# EAGLE board Light switch schematic (EAGLE 9.1.3)
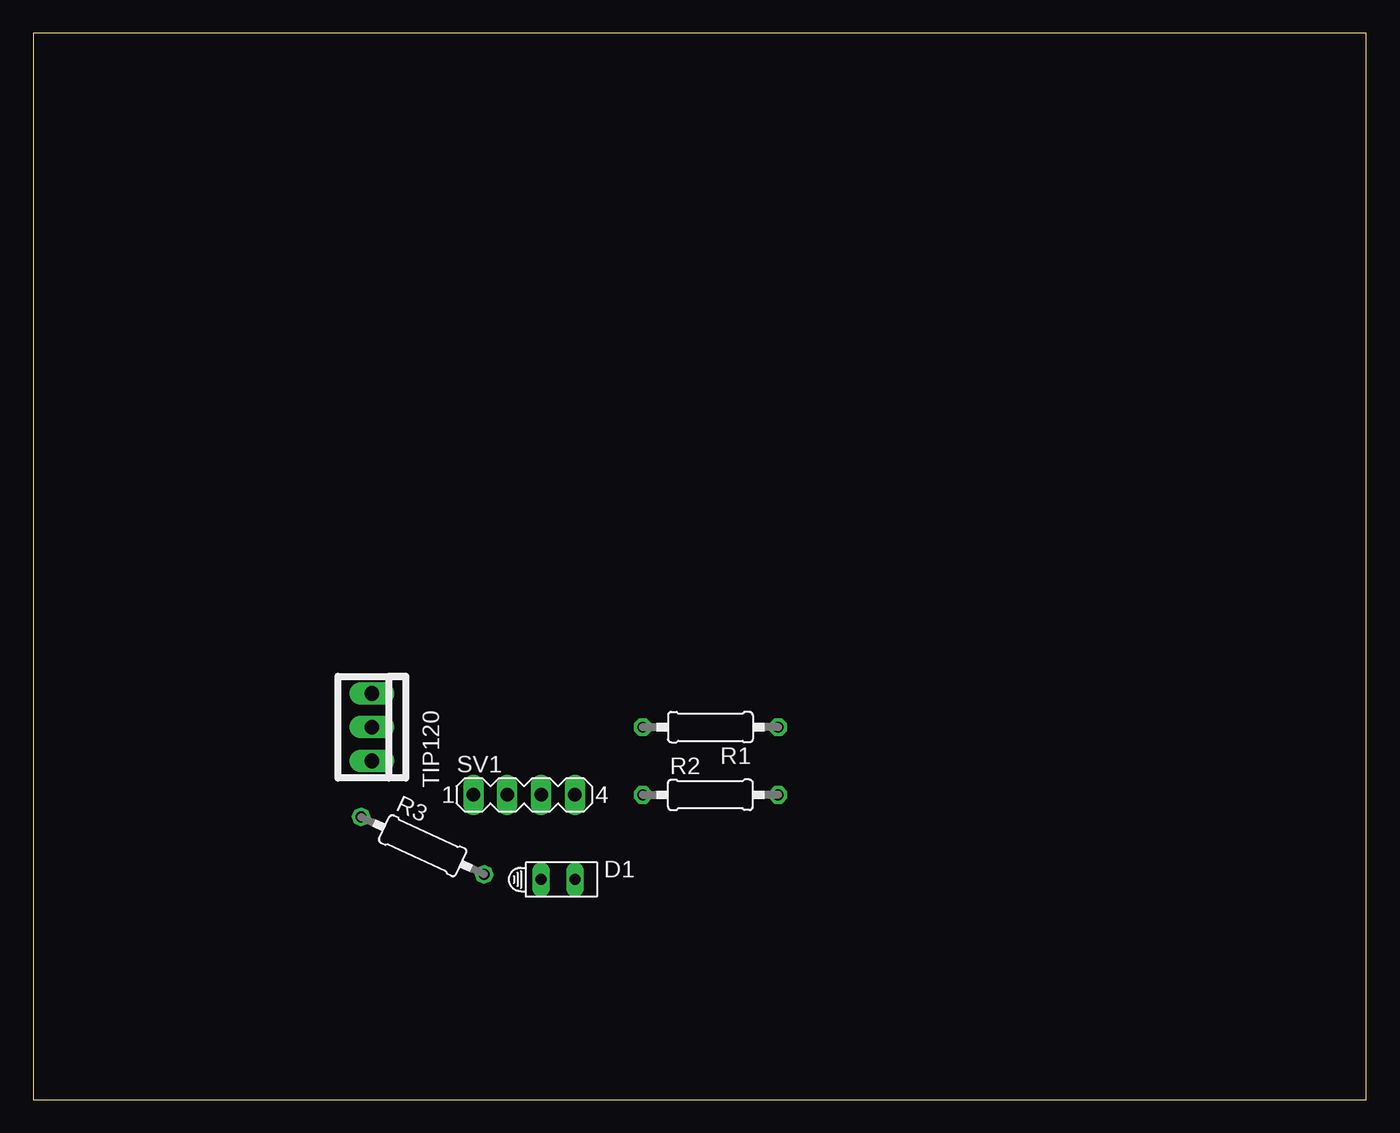
[diagram p0: board, top side]
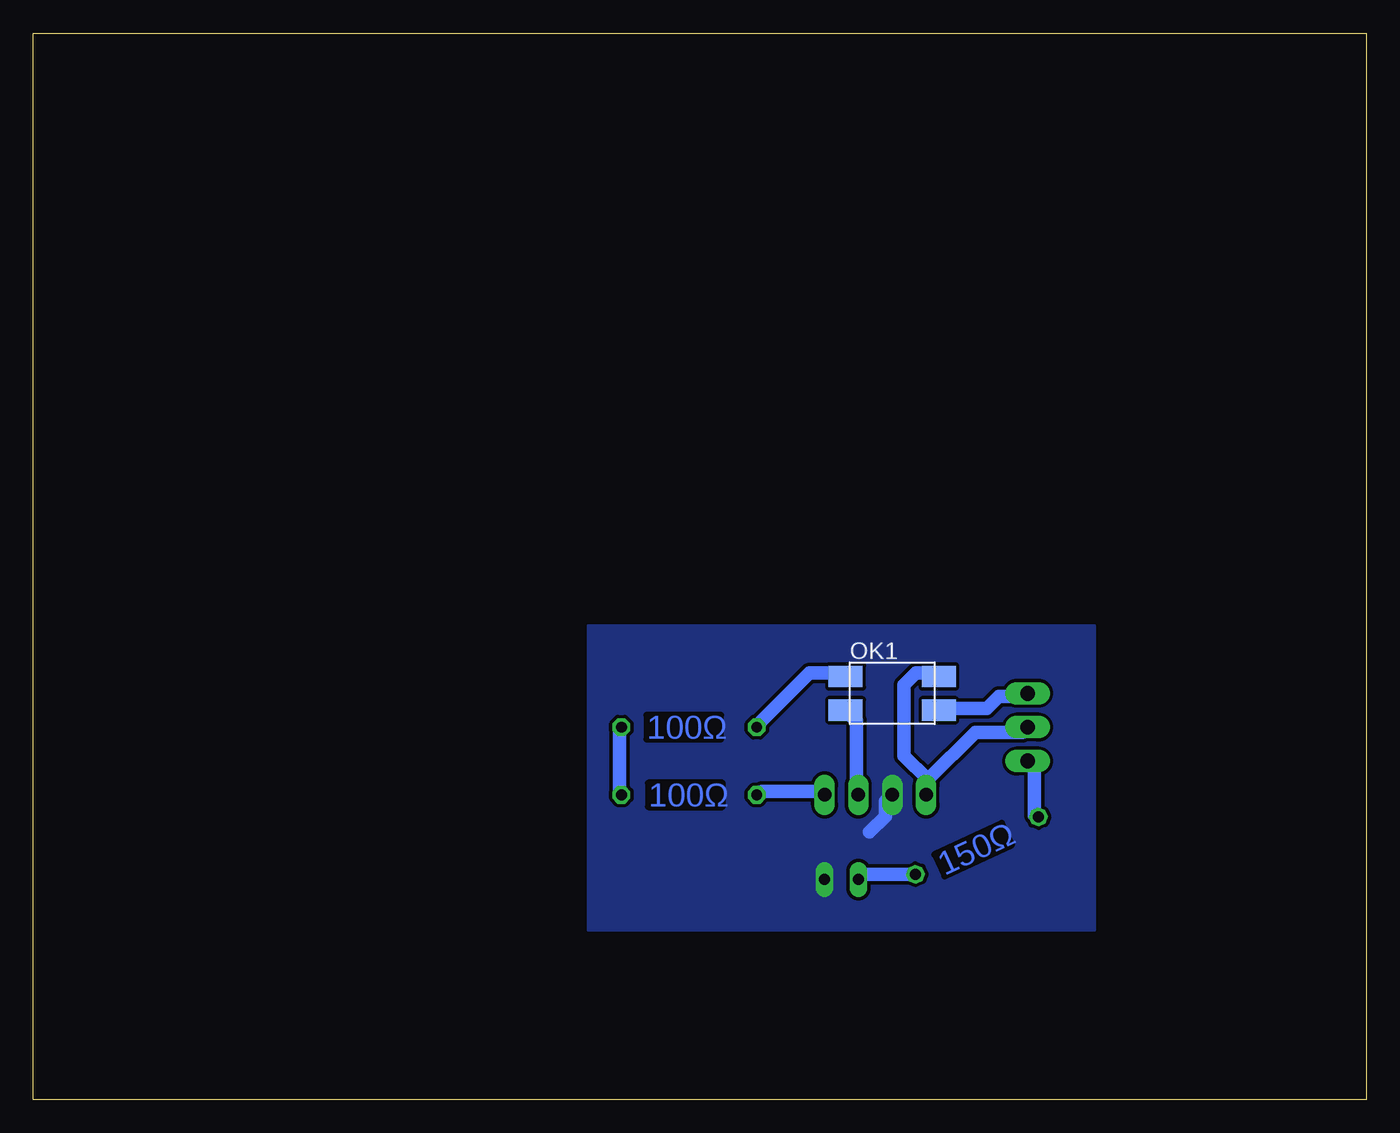
[diagram p1: board, bottom side, seen from below]

Size 100 x 80 mm. Coordinates in mm from the lower left corner, seen from the top.
Outline: 0,0 100,0 100,80 0,80 0,0
Copper layers (1*16): Top 0.035mm / dielectric 1.5mm / Bottom 0.035mm
Design rules "default *": minimum track width 6mil, minimum drill 0.35mm, track to track 6mil, track to pad 6mil, pad to pad 6mil, via to via 6mil, smd to smd 6mil, copper to edge 40mil, drill to drill 6mil, minimum pad ring 10mil, minimum via ring 8mil, stop-mask expansion 10mil, vias tented up to drill 0mil, thermal gap 10mil
Net classes: 0 default: width 1.016 mm, drill 0.762 mm, clearance 0.254 mm

## Footprints (pad centres in the part's own frame; a part is rotated, then mirrored left to right if it is on the bottom)
HLMP6 = drill 0.813 long: A -1.27,0; K 1.27,0
DIL4-SMD = smd 1.6 x 2.54: 1 -1.27,-3.5; 2 1.27,-3.5; 3 1.27,3.5; 4 -1.27,3.5
TO220AH = drill 1.118 long: B -2.54,-6.35; C 0,-6.35; E 2.54,-6.35
0207/10 = drill 0.813 octagon: 1 -5.08,0; 2 5.08,0
MA04-1 = drill 1.016 long: 1 -3.81,0; 2 -1.27,0; 3 1.27,0; 4 3.81,0

## Placement (x,y rotation side)
D1  HLMP6  [HLMP6]  39.37,16.51 0 top
OK1  LTV816W  [DIL4-SMD]  35.56,30.48 270 bottom
Q1  TIP120  [TO220AH]  31.75,27.94 270 top
R1  100Ω  [0207/10]  50.8,27.94 180 top
R2  100Ω  [0207/10]  50.8,22.86 0 top
R3  150Ω  [0207/10]  29.21,19.05 335 top
SV1  [MA04-1]  36.83,22.86 0 top

## Library data of the parts
D1 = display-hp; MF: AGILENT TECHNOLOGIES; MPN: HLMP-6500; OC_FARNELL: 1652490; OC_NEWARK: 40K0088
OK1 = PC357
Q1 = Powaaah-transistor
R1 R2 = resistor
R3 = resistor; SPICEPREFIX: R
SV1 = con-lstb; OC_FARNELL: unknown; OC_NEWARK: unknown

## Nets
0: D1.K SV1.2
+UB: R2.1 SV1.4
GND: OK1.2 SV1.3
N$1: OK1.3 Q1.B
N$2: OK1.1 R1.2
N$3: R1.1 R2.2
N$4: Q1.E R3.1
N$5: D1.A R3.2
VCC: OK1.4 Q1.C SV1.1

## Tracks (layer width: path | path; a pad name or v marks a point on that pad's centre or on a via)
0
  Bottom 1.016: SV1.2 36.07,22.35 36.07,21.26 37.26,20.07
  pour Bottom (no thermals): 20.32,35.56 58.42,35.56 58.42,12.7 20.32,12.7
+UB
  Bottom 1.016: R2.1 45.34,23.11 40.89,23.11 SV1.4
GND
  Bottom 1.016: OK1.2 38.23,28.45 38.23,23.11 SV1.3
N$1
  Bottom 1.016: OK1.3 32,29.34 28.45,29.34 27.56,30.23 25.78,30.23 Q1.B
N$2
  Bottom 1.016: OK1.1 39.12,32 41.78,32 45.34,28.45 R1.2
N$3
  Bottom 1.016: R2.2 56.01,23.11 56.01,27.56 R1.1
N$4
  Bottom 1.016: R3.1 24.89,21.34 24.89,24.89 Q1.E
N$5
  Bottom 1.016: D1.A 38.23,16.89 33.78,16.89 R3.2
VCC
  Bottom 1.016: 32.89,24 34.67,25.78 34.67,31.11 33.78,32 32.89,32 OK1.4 | 32.89,24 32.89,23.11 SV1.1 32.89,24 | 32.89,24 29.34,27.56 25.78,27.56 Q1.C

## Text on the board
Bottom: 100Ω | 100Ω | 150Ω